# Altium PCB M3FMCWS_B.PcbDoc (part 2 of 2)
Units mil, origin at the board's own origin, x right, y up, seen from the top; angles counter-clockwise.
Board outline 3000 x 2800 mil, 4 copper layers (Top Layer, Layer 1, Layer 2, Bottom Layer), stack 60.556 mil thick; 145 components, 95 nets, 592 pads, 1074 vias.
Unrouted connection lines stored in the file: 9.
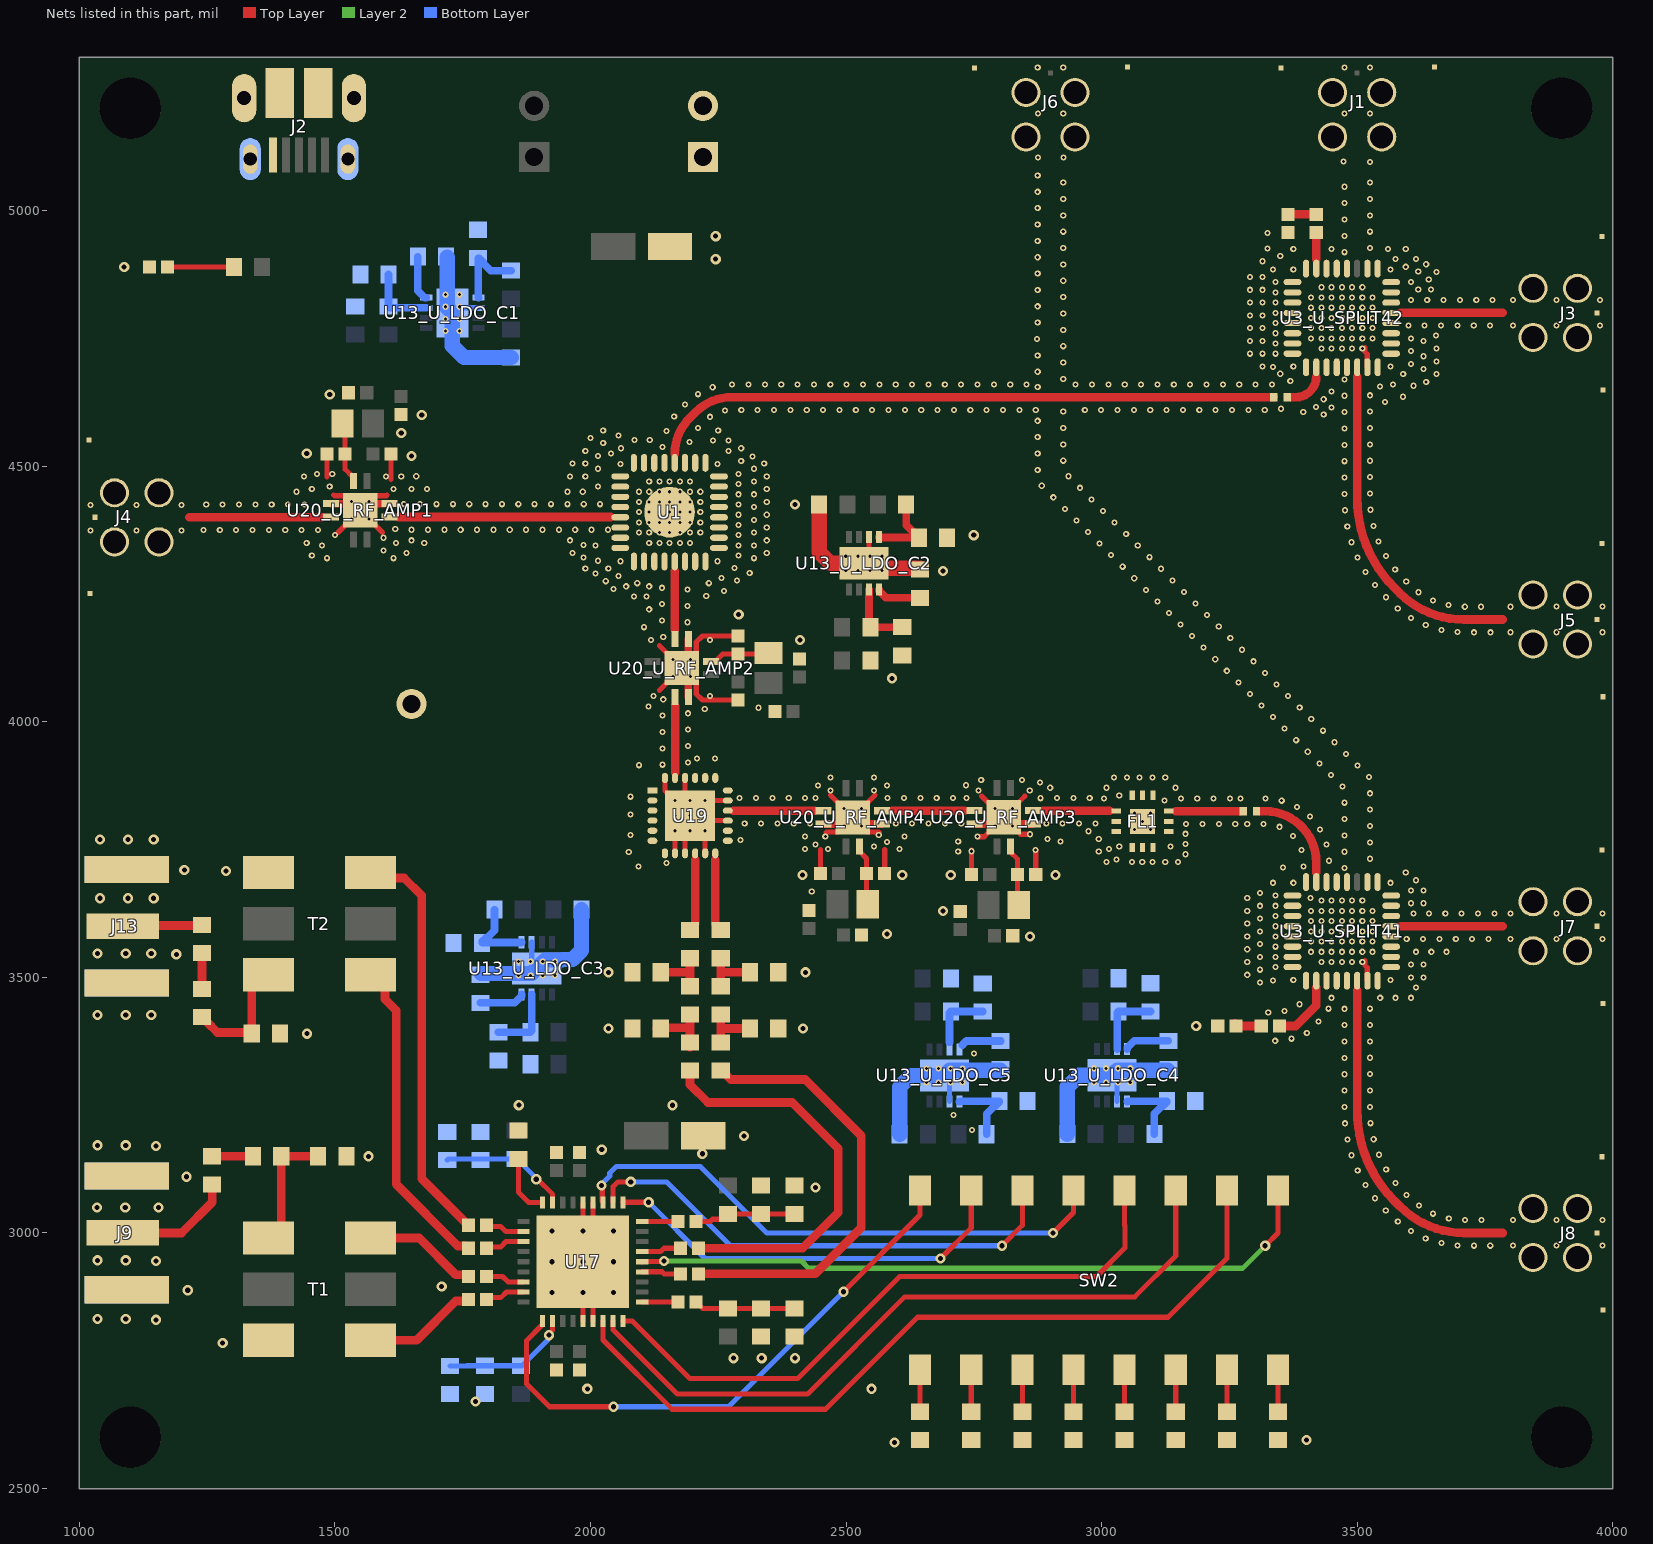
[diagram p4: the nets of this part, all layers, seen from the top]

## Via types
v1: diameter 12, hole 6, Top Layer to Bottom Layer, tented both sides, 958 vias
v2: diameter 20, hole 10, Top Layer to Bottom Layer, tented both sides, 107 vias
v3: diameter 22, hole 10, Top Layer to Bottom Layer, tented both sides, 9 vias

## Nets (pads, with @x,y where several pads share a name; then routed paths per layer and width w, separated by ;. In a path a pad name is that pad's centre, name@x,y a point inside that pad or via, vN(x,y) a via of type N, cw(c..) or ccw(c..) an arc to the next point about the centre after c; other vN are vias at no path point) (continued)
GND: C22.1 C23.1 C28.1 C29.1 C32_U_RF_AMP1.1 C32_U_RF_AMP2.1 C32_U_RF_AMP3.1 C32_U_RF_AMP4.1 C33_U_RF_AMP1.1 C33_U_RF_AMP2.1 C33_U_RF_AMP3.1 C33_U_RF_AMP4.1 C34_U_RF_AMP1.2 C34_U_RF_AMP2.2 C34_U_RF_AMP3.2 C34_U_RF_AMP4.2 C35_U_RF_AMP1.2 C35_U_RF_AMP2.2 C35_U_RF_AMP3.2 C35_U_RF_AMP4.2 C52.2 C53.1 C54.1 C55.1 C56.1 C57.2 C58.1 C70_U_LDO_C1.1 C70_U_LDO_C2.1 C70_U_LDO_C3.1 C70_U_LDO_C4.1 C70_U_LDO_C5.1 C71_U_LDO_C1.1 C71_U_LDO_C2.1 C71_U_LDO_C3.1 C71_U_LDO_C4.1 C71_U_LDO_C5.1 C72_U_LDO_C1.2 C72_U_LDO_C2.2 C72_U_LDO_C3.2 C72_U_LDO_C4.2 C72_U_LDO_C5.2 C141.2 FL1.1 FL1.2 FL1.4 FL1.5 FL1.6 FL1.8 FL1.9 FL1.10 FL1.11 FL1.12 FL1.13 J1.2 J1.3 J1.4 J1.5 J1.6 J1.7 J2.5 J2.6 J2.7 J2.8 J2.9 J2.10 J2.11 J2.S1 J2.S2 J3.2 J3.3 J3.4 J3.5 J3.6 J3.7 J4.2 J4.3 J4.4 J4.5 J4.6 J4.7 J5.2 J5.3 J5.4 J5.5 J5.6 J5.7 J6.2 J6.3 J6.4 J6.5 J6.6 J6.7 J7.2 J7.3 J7.4 J7.5 J7.6 J7.7 J8.2 J8.3 J8.4 J8.5 J8.6 J8.7 J9.2_1 J9.2_2 J9.3_1 J9.3_2 J13.2_1 J13.2_2 J13.3_1 J13.3_2 L2_U_HPF1.1 L2_U_HPF2.1 L4_U_HPF1.1 L4_U_HPF2.1 P3.1 P3.2 R3.1 R16.1 R18.1 R19.1 R26.2 R27.2 R28.2 R29.2 R30.2 R31.2 R33.2 R34.2 R37.1 R38.1 R39.1 R44.1 R95_U_LDO_C1.1 R95_U_LDO_C2.1 R95_U_LDO_C3.1 R95_U_LDO_C4.1 R95_U_LDO_C5.1 R103_U_LDO_C1.1 R103_U_LDO_C2.1 R103_U_LDO_C3.1 R103_U_LDO_C4.1 R103_U_LDO_C5.1 T1.6 T2.4 TP1.1 U1.1 U1.2 U1.3 U1.4 U1.5 U1.6 U1.7 U1.8 U1.9 U1.10 U1.11 U1.13 U1.14 U1.15 U1.16 U1.17 U1.18 U1.19 U1.20 U1.22 U1.23 U1.24 U1.25 U1.26 U1.27 U1.28 U1.30 U1.31 U1.32 U1.33 U3_U_SPLIT41.1 U3_U_SPLIT41.2 U3_U_SPLIT41.3 U3_U_SPLIT41.4 U3_U_SPLIT41.5 U3_U_SPLIT41.6 U3_U_SPLIT41.7 U3_U_SPLIT41.8 U3_U_SPLIT41.9 U3_U_SPLIT41.11 U3_U_SPLIT41.12 U3_U_SPLIT41.13 U3_U_SPLIT41.15 U3_U_SPLIT41.16 U3_U_SPLIT41.17 U3_U_SPLIT41.18 U3_U_SPLIT41.19 U3_U_SPLIT41.20 U3_U_SPLIT41.22 U3_U_SPLIT41.23 U3_U_SPLIT41.24 U3_U_SPLIT41.25 U3_U_SPLIT41.26 U3_U_SPLIT41.28 U3_U_SPLIT41.29 U3_U_SPLIT41.30 U3_U_SPLIT41.32 U3_U_SPLIT41.33 U3_U_SPLIT42.1 U3_U_SPLIT42.2 U3_U_SPLIT42.3 U3_U_SPLIT42.4 U3_U_SPLIT42.5 U3_U_SPLIT42.6 U3_U_SPLIT42.7 U3_U_SPLIT42.8 U3_U_SPLIT42.9 U3_U_SPLIT42.11 U3_U_SPLIT42.12 U3_U_SPLIT42.13 U3_U_SPLIT42.15 U3_U_SPLIT42.16 U3_U_SPLIT42.17 U3_U_SPLIT42.18 U3_U_SPLIT42.19 U3_U_SPLIT42.20 U3_U_SPLIT42.22 U3_U_SPLIT42.23 U3_U_SPLIT42.24 U3_U_SPLIT42.25 U3_U_SPLIT42.26 U3_U_SPLIT42.28 U3_U_SPLIT42.29 U3_U_SPLIT42.30 U3_U_SPLIT42.32 U3_U_SPLIT42.33 U13_U_LDO_C1.6 U13_U_LDO_C1.9 U13_U_LDO_C2.6 U13_U_LDO_C2.9 U13_U_LDO_C3.6 U13_U_LDO_C3.9 U13_U_LDO_C4.6 U13_U_LDO_C4.9 U13_U_LDO_C5.6 U13_U_LDO_C5.9 U17.5 U17.6 U17.22 U17.23 U17.37 U19.1 U19.2 U19.3 U19.4 U19.5 U19.6 U19.7 U19.8 U19.9 U19.11 U19.13 U19.14 U19.15 U19.17 U19.18 U19.19 U19.20 U19.21 U19.22 U19.24 U19.25 U20_U_RF_AMP1.1 U20_U_RF_AMP1.6 U20_U_RF_AMP1.9 U20_U_RF_AMP2.1 U20_U_RF_AMP2.6 U20_U_RF_AMP2.9 U20_U_RF_AMP3.1 U20_U_RF_AMP3.6 U20_U_RF_AMP3.9 U20_U_RF_AMP4.1 U20_U_RF_AMP4.6 U20_U_RF_AMP4.9 | length 4664.6
  Top Layer w10: 1484.83,4478.65 C35_U_RF_AMP1.2@1484.83,4523.65 ; 1497.74,4443.53 1499.12,4442.15 1521.32,4442.15 v1(1532.83,4430.65) v1(1549.83,4413.65) ; 1506.32,4370.14 v1(1532.83,4396.65) v1(1549.83,4413.65) ; 1593.33,4370.14 v1(1566.83,4396.65) v1(1549.83,4413.65) ; 1601.91,4443.53 1600.54,4442.15 1578.33,4442.15 v1(1566.83,4430.65) v1(1549.83,4413.65) ; 1610.26,4474.08 C34_U_RF_AMP1.2@1610.26,4523.65 ; U17.5@1985.24,2827.44 v3(1985.24,2883.68) ; U17.23@1985.24,3059.91 v3(1985.24,3003.68) v3(1985.24,2943.68) ; U17.6@2004.92,2827.44 2004.92,2863.99 v3(1985.24,2883.68) ; U17.22@2004.92,3059.91 2004.92,2963.36 v3(1985.24,2943.68) ; U19.1@2119.66,3865.59 U19.1@2120,3865.25 ; 2135.14,4061.67 v1(2178.65,4105.17) ; 2135.14,4148.68 v1(2178.65,4105.17) ; U19.24@2145.79,3890.09 2145.79,3865.59 2163.85,3847.53 2163.85,3845.91 2174.92,3834.83 2182.31,3834.83 2193.38,3823.76 U19.25@2193.38,3840.42 ; U19.25@2154.01,3826.22 U19.25@2163.85,3816.38 ; U19.25@2163.85,3786.85 U19.25@2193.38,3816.38 ; U19.8@2165.47,3742.66 v1(2165.47,3786.85) ; U19.9@2185.16,3742.66 2185.16,3778.63 2193.38,3786.85 U19.25@2193.38,3816.38 ; U19.22@2185.16,3890.09 2185.16,3854.13 U19.25@2193.38,3845.91 ; U19.25@2222.91,3786.85 U19.25@2203.22,3806.54 ; U19.11@2224.53,3742.66 v1(2224.53,3786.85) ; U19.15@2267.09,3806.54 U19.25@2203.22,3806.54 ; U19.17@2267.09,3845.91 2222.91,3845.91 U19.25@2193.38,3816.38 ; C34_U_RF_AMP2.2@2288.65,4042.46 2219.16,4042.46 2207.15,4054.46 2207.15,4076.67 2191.64,4092.18 v1(2178.65,4105.17) ; C35_U_RF_AMP2.2@2288.65,4167.89 2219.16,4167.89 2207.15,4155.88 2207.15,4133.68 2191.64,4118.17 v1(2178.65,4105.17) ; C34_U_RF_AMP4.2@2450.28,3702.91 2450.28,3750.2 ; 2460.91,3783.03 2462.28,3784.41 2484.49,3784.41 v1(2495.99,3795.91) 2500,3799.92 v1(2512.99,3812.91) ; 2469.49,3856.42 v1(2495.99,3829.91) v1(2512.99,3812.91) ; U13_U_LDO_C2.9@2535,4310 2544.84,4319.84 U13_U_LDO_C2.6@2544.84,4361.18 ; 2556.5,3856.42 v1(2529.99,3829.91) v1(2512.99,3812.91) ; v1@2565.08,3783.03 2563.7,3784.41 2541.5,3784.41 v1(2529.99,3795.91) 2525.98,3799.92 v1(2512.99,3812.91) ; C35_U_RF_AMP4.2@2575.71,3702.91 2575.71,3750.2 ; C34_U_RF_AMP3.2@2745.77,3701.35 v1@2745.77,3748.64 ; v1@2757.68,3775 2770.49,3775 2789.84,3794.35 2791.49,3794.35 2795.5,3798.36 U20_U_RF_AMP3.9@2808.49,3811.35 ; 2764.92,3854.92 2791.49,3828.35 U20_U_RF_AMP3.9@2808.49,3811.35 ; U20_U_RF_AMP3.9@2825.49,3828.35 U20_U_RF_AMP3.9@2808.49,3811.35 ; v1(2825.49,3830) 2849.69,3854.2 ; v1(2860,3780) 2841.49,3780 2827.13,3794.35 2825.49,3794.35 2821.48,3798.36 U20_U_RF_AMP3.9@2808.49,3811.35 ; C35_U_RF_AMP3.2@2871.2,3701.35 v1@2871.2,3748.64 ; v1@3515,3532.39 3515,3523.79 3519.62,3519.17 3519.62,3493.88 U3_U_SPLIT41.15@3520,3493.5 ; v1@3515,4732.39 3515,4723.79 3519.62,4719.17 3519.62,4693.88 U3_U_SPLIT42.15@3520,4693.5 ; v3(1985.24,2883.68) v3(1985.24,2943.68) ; U19.25@2193.38,3816.38 U19.25@2203.22,3806.54
  Top Layer w15: U20_U_RF_AMP1.1@1492.74,4426.64 1528.82,4426.64 v1(1532.83,4430.65) ; v1(1566.83,4430.65) 1570.83,4426.64 U20_U_RF_AMP1.6@1606.91,4426.64 ; U20_U_RF_AMP2.6@2191.64,4048.09 U20_U_RF_AMP2.9@2191.64,4092.18 ; U20_U_RF_AMP2.9@2191.64,4118.17 U20_U_RF_AMP2.1@2191.64,4162.26 ; U20_U_RF_AMP4.6@2455.91,3799.92 U20_U_RF_AMP4.9@2500,3799.92 ; U20_U_RF_AMP4.9@2525.98,3799.92 U20_U_RF_AMP4.1@2570.08,3799.92 ; C72_U_LDO_C2.2@2643.03,4297.56 C72_U_LDO_C2.2@2645,4297.56 ; U20_U_RF_AMP3.6@2751.4,3800.01 2787.48,3800.01 v1(2791.49,3796) ; v1(2825.49,3796) 2829.5,3800.01 U20_U_RF_AMP3.1@2865.57,3800.01
  Top Layer w30: C70_U_LDO_C2.1@2447.44,4425 2447.44,4332.56 2470,4310 U13_U_LDO_C2.9@2535,4310 2545,4300 C72_U_LDO_C2.2@2644.02,4300
  Bottom Layer w10: U13_U_LDO_C1.9@1730,4800 1739.84,4809.84 U13_U_LDO_C1.6@1781.18,4809.84 ; U13_U_LDO_C3.6@1885.17,3568.74 1885.17,3527.4 U13_U_LDO_C3.9@1895.01,3517.56 ; U13_U_LDO_C5.9@2692.56,3308.07 2702.4,3298.23 U13_U_LDO_C5.6@2702.4,3256.89 ; U13_U_LDO_C4.9@3020.57,3308.32 3030.41,3298.48 U13_U_LDO_C4.6@3030.41,3257.14
  Bottom Layer w15: C72_U_LDO_C1.2@1717.56,4908.03 C72_U_LDO_C1.2@1717.56,4910 ; C72_U_LDO_C3.2@1785.01,3505.12 C72_U_LDO_C3.2@1786.98,3505.12 ; C72_U_LDO_C5.2@2800.59,3320.51 C72_U_LDO_C5.2@2802.56,3320.51 ; C72_U_LDO_C4.2@3128.6,3320.76 C72_U_LDO_C4.2@3130.57,3320.76
  Bottom Layer w30: C72_U_LDO_C1.2@1720,4909.02 1720,4810 U13_U_LDO_C1.9@1730,4800 1730,4735 1752.56,4712.44 C70_U_LDO_C1.1@1845,4712.44 ; C72_U_LDO_C3.2@1786,3507.56 1885.01,3507.56 U13_U_LDO_C3.9@1895.01,3517.56 1911.51,3534.06 1944.67,3534.06 1945.62,3535 1965,3535 1982.57,3552.57 C70_U_LDO_C3.1@1982.57,3632.56 ; C70_U_LDO_C5.1@2605,3193.07 2605,3285.51 2627.56,3308.07 U13_U_LDO_C5.9@2692.56,3308.07 2702.56,3318.07 C72_U_LDO_C5.2@2801.57,3318.07 ; C70_U_LDO_C4.1@2933.01,3193.32 2933.01,3285.76 2955.57,3308.32 U13_U_LDO_C4.9@3020.57,3308.32 3030.57,3318.32 C72_U_LDO_C4.2@3129.58,3318.32
  other v1: 3728.32,2975.02 3760.32,2975.02 3805,2975.15 3890,2975.15 3980.14,2975.15 3696.33,2975.57 3664.64,2980.04 3634.02,2989.32 3605.38,3003.59 3579.45,3022.35 3711.07,3024.98 3743.07,3024.98 3805,3025.15 3890,3025 3980.14,3025.15 3679.24,3028.24 3648.65,3037.65 3555.9,3044.02 3620.87,3053.53 3534.53,3067.83 3596.72,3074.53 3516.19,3094.06 3574.79,3097.83 3501.01,3122.22 3556.76,3124.27 3489.17,3151.96 3542.54,3152.94 3480.85,3182.85 3532.32,3183.26 2746.42,3201.44 3476.15,3214.51 3526.35,3214.7 2710.28,3230.94 3475.02,3246.49 3524.98,3246.67 3475.02,3278.49 3524.98,3278.67 2657.13,3294.29 2680.75,3294.29 2704.37,3294.29 2727.99,3294.29 2985.13,3294.54 3008.76,3294.54 3032.38,3294.54 3056,3294.54 3475.02,3310.49 3524.98,3310.67 2657.13,3321.85 2680.75,3321.85 2704.37,3321.85 2727.99,3321.85 2985.13,3322.1 3008.76,3322.1 3032.38,3322.1 3056,3322.1 3475.02,3342.49 3524.98,3342.67 2750.28,3350.94 3475.02,3374.49 3524.98,3374.67 3339.65,3375.89 3371.38,3380.02 3401.41,3391.08 3475.02,3406.49 3524.98,3406.67 3424.04,3413.71 3326.06,3431.12 3357.92,3434.11 3475.02,3438.49 3444.04,3438.68 3524.98,3438.67 3387.04,3447.37 3450,3460 3545,3460 3575,3460 3605,3460 3615,3480 3310,3490 3335.5,3493.82 3375,3495 3565,3495 3605,3500 3630,3500 1859.58,3503.78 1883.2,3503.78 1906.83,3503.78 1930.45,3503.78 3285,3505 3310,3515 3340,3520 3605,3525 3630,3525 3285,3530 3430,3530 3450,3530 3470,3530 3490,3530 3510,3530 1859.58,3531.34 1883.2,3531.34 1906.83,3531.34 1930.45,3531.34 3310,3540 3340,3540 3410,3550 3430,3550 3450,3550 3470,3550 3490,3550 3510,3550 3530,3550 3615,3550 3645,3550 3675,3550 3285,3555 3340,3560 3310,3565 3410,3570 3430,3570 3450,3570 3470,3570 3490,3570 3510,3570 3530,3570 3596.9,3574.97 3628.9,3574.97 3660.9,3574.97 3692.9,3574.97 3724.9,3574.97 3756.9,3574.97 3800,3575.15 3890,3575.15 3980.14,3575.15 3285,3580 3340,3580 3310,3590 3410,3590 3430,3590 3450,3590 3470,3590 3490,3590 3510,3590 3530,3590 3340,3600 3285,3605 3410,3610 3430,3610 3450,3610 3470,3610 3490,3610 3510,3610 3530,3610 3310,3615 3340,3620 3610,3625 3640.36,3625.03 3672.36,3625.03 3704.36,3625.03 3736.36,3625.03 3768.36,3625.03 3800,3625.15 3890,3625.15 3980.14,3625.15 3285,3630 3410,3630 3430,3630 3450,3630 3470,3630 3490,3630 3510,3630 3530,3630 3310,3640 3340,3640 3605,3645 3630,3645 3430,3650 3450,3650 3470,3650 3490,3650 3510,3650 3285,3655 3408.97,3655.46 3340,3660 3310,3665 2432.99,3667.91 3605,3670 3630,3670 3335,3685 3375,3685 3565,3685 3615,3690 3595,3705 3475.02,3713.67 3355,3715 2093.97,3716.69 3395.02,3717.14 2149.16,3723.5 3009.49,3725.86 3059.49,3725.86 3079.49,3725.86 3099.49,3725.86 3124.49,3725.86 3149.49,3725.86 3444.96,3728.09 3029.49,3730.86 3524.98,3732.08 3164.49,3740.86 2075,3745 2719.49,3745.86 2994.49,3745.86 3475.02,3745.67 2745.68,3746.75 2870.7,3749.49 3390.81,3748.86 2419.49,3750.86 2464.49,3750.86 2604.49,3750.86 3014.49,3750.86 2554.49,3755.86 3034.49,3755.86 3134.49,3755.86 2440,3760 3440.03,3759.7 3164.49,3760.86 3524.98,3764.08 2580,3765 2719.49,3765.86 2919.49,3765.86 2293.38,3768.38 2894.49,3770.86 2994.49,3770.86 2419.49,3775.86 2459.49,3775.86 2614.49,3775.86 2757.18,3775.86 3374.46,3776.37 2078.38,3778.38 3475.02,3777.67 2564.03,3778.56 3164.49,3780.86 2974.49,3785.86 2195,3786.85 3064.08,3789 3096.08,3789 3427.16,3789 3348.1,3794.52 3524.98,3796.08 3165.45,3800.1 3197.45,3800.1 3229.45,3800.1 3261.45,3800.1 3285,3800 3316.58,3800.02 2301.8,3801.24 2333.8,3801.24 2365.8,3801.24 2397.8,3801.24 2429.8,3801.24 2597.41,3800.87 2629.41,3800.87 2661.41,3800.87 2693.41,3800.87 2725.41,3800.87 2891.87,3801.01 2923.87,3801.01 2955.87,3801.01 2987.87,3801.01 3080.08,3805 3475.02,3809.67 2808.49,3813 3407.59,3814.32 2165.47,3816.38 2195,3816.38 2224.53,3816.38 2078.38,3818.38 3064.08,3821 3096.08,3821 3524.98,3828.08 2791.49,3830 3381.93,3833.44 3475.02,3841.67 2165.47,3845.91 2195,3845.91 2224.53,3845.91 3123.34,3846.31 3352.33,3845.6 2880.75,3850.45 3005,3850 3155.12,3850.06 3187.12,3850.06 3219.12,3850.06 3251.12,3850.06 3271.58,3849.75 3320.64,3850.02 2291.94,3851.2 2323.94,3851.2 2355.94,3851.2 2387.94,3851.2 2419.94,3851.2 2440.36,3850.89 2581.45,3850.94 2613.45,3850.94 2645.45,3850.94 2677.45,3850.94 2709.45,3850.94 2735.67,3850.62 2912.75,3850.97 2944.75,3850.97 2976.75,3850.97 2078.38,3853.38 3034.49,3855.86 3524.98,3860.08 2469.49,3865.86 2554.49,3865.86 2759.49,3865.86 2859.49,3865.86 2899.49,3870.86 3009.49,3870.86 3144.49,3870.86 3471.23,3873.44 2445,3875 2580,3875 2734.49,3875.86 2879.49,3880.86 2764.49,3885.86 2844.49,3885.86 2469.49,3890.86 2554.49,3890.86 3024.49,3890.86 3049.49,3890.86 3074.49,3890.86 3099.49,3890.86 3124.49,3890.86 3523.37,3892.04 3448.6,3896.07 2095,3915 3500.7,3914.63 2140.72,3915.99 3425.98,3918.7 2190.58,3920.58 2208.38,3928.38 2243.38,3928.38 3478.07,3937.25 3403.35,3941.32 2140.72,3947.99 2190.58,3952.58 3455.45,3959.88 3380.72,3963.95 2140.72,3979.99 3432.82,3982.51 2190.58,3984.58 3358.09,3986.58 3410.19,4005.14 3335.47,4009.21 2140.72,4011.99 2190.58,4016.58 2223.65,4025.17 2328.65,4027.46 3387.56,4027.76 2113.65,4030.17 3312.84,4031.83 2142.45,4043.95 2123.65,4050.17 2233.65,4050.17 3364.94,4050.39 3290.21,4054.46 3342.31,4073.02 3267.58,4077.09 2161.65,4088.17 2195.65,4088.17 3319.68,4095.65 3244.96,4099.72 3297.05,4118.27 2161.65,4122.17 2195.65,4122.17 3222.33,4122.34 3274.43,4140.9 3199.7,4144.97 2118.65,4160.17 2233.65,4160.17 3251.8,4163.53 2142.45,4166.16 3177.07,4167.6 3728.56,4175.02 3760.56,4175.02 3800,4175.15 3890,4175.15 3980.14,4175.15 3696.56,4175.51 3664.85,4179.85 2105,4185 3229.17,4186.16 3634.19,4189 3154.45,4190.23 2189.98,4194.67 2140.02,4198.07 3605.42,4203 3206.54,4208.78 3131.82,4212.85 2115,4220 3579.39,4221.62 3710.52,4224.98 3742.52,4224.98 3800,4225 3890,4225.15 3980.14,4225.15 2189.98,4226.67 3678.68,4228.21 2140.02,4230.07 3183.92,4231.41 3109.19,4235.48 3648.07,4237.54 3556.1,4243.57 2085,4245 2110,4245 2226.62,4246.06 3620.26,4253.37 3161.29,4254.04 2261.62,4256.06 3086.57,4258.11 2189.98,4258.67 2045,4260 2140.02,4262.07 2070,4265 2115,4265 3534.55,4267.22 2091.62,4271.06 2231.62,4271.06 3596.04,4274.28 2030,4275 2286.62,4276.06 3138.66,4276.67 2256.62,4281.06 3063.94,4280.74 2055,4285 2010,4290 2311.62,4291.06 3516.01,4293.3 2499.57,4296.22 2523.19,4296.22 2546.81,4296.22 2570.43,4296.22 3574.35,4297.81 3116.03,4299.29 1990,4300 2035,4300 2281.62,4301.06 3041.31,4303.36 2058.85,4313.96 2248.85,4313.96 2015,4315 1485,4320 1615,4320 2320,4320 1986.62,4321.06 3500.77,4321.44 3093.41,4321.92 2499.57,4323.78 2523.19,4323.78 2546.81,4323.78 2570.43,4323.78 3556.22,4324.17 1455,4325 2290,4325 3018.68,4325.99 1640,4330 1965,4330 2345,4330 1595,4335 1475,4345 2010,4345 2290,4345 2320,4345 3070.78,4344.55 1986.62,4346.06 2996.06,4348.62 1445,4350 1620,4350 1675,4350 2115,4350 2135,4350 2155,4350 2175,4350 2195,4350 3488.93,4351.17 3542.01,4352.85 1650,4355 1960,4355 2345,4355 1595,4360 1500,4365 2290,4365 3048.15,4367.18 2095,4370 2115,4370 2135,4370 2155,4370 2175,4370 2195,4370 2215,4370 2320,4370 2973.43,4371.24 1022,4373.85 1112,4373.85 1200,4373.85 1243.01,4375.02 1275.01,4375.02 1307.01,4375.02 1339.01,4375.02 1371.01,4375.02 1403.01,4375.02 1435.01,4375.02 1467.01,4375.02 1650.25,4375.67 1682.25,4375.67 1714.25,4375.67 1746.25,4375.67 1778.25,4375.67 1810.25,4375.67 1842.25,4375.67 1874.25,4375.67 1906.25,4375.67 1938.25,4375.67 1970.25,4375.67 2002.25,4375.67 2034.25,4375.67 1618.27,4376.74 2345,4380 3480.66,4382.08 3531.87,4383.2 2290,4385 2095,4390 2115,4390 2135,4390 2155,4390 2175,4390 2195,4390 2215,4390 3025.52,4389.8 2950.8,4393.87 2320,4395 2290,4405 2345,4405 2095,4410 2115,4410 2135,4410 2155,4410 2175,4410 2195,4410 2215,4410 3002.9,4412.43 3476.08,4413.75 3526.23,4414.7 2928.17,4416.5 2320,4420 1022,4423.85 1112,4423.85 1200,4423.85 1248.51,4424.98 1280.51,4424.98 1312.51,4424.98 1344.51,4424.98 1376.51,4424.98 1408.51,4424.98 1440.51,4424.98 2290,4425 1634.96,4425.63 1666.96,4425.63 1698.96,4425.63 1730.96,4425.63 1762.96,4425.63 1794.96,4425.63 1826.96,4425.63 1858.96,4425.63 1890.96,4425.63 1922.96,4425.63 1954.96,4425.63 1986.96,4425.63 2018.96,4425.63 2095,4430 2115,4430 2135,4430 2155,4430 2175,4430 2195,4430 2215,4430 2345,4430 2980.27,4435.06 2905.55,4439.13 2290,4445 2320,4445 3475.02,4445.73 3524.98,4446.67 1425,4450 1955,4450 1985,4450 2095,4450 2115,4450 2135,4450 2155,4450 2175,4450 2195,4450 2215,4450 1455,4455 1615,4455 1650,4455 1680,4455 2345,4455 2957.64,4457.68 1490,4460 2015,4460 2882.92,4461.75 2290,4465 2115,4470 2135,4470 2155,4470 2175,4470 2195,4470 2320,4470 3475.02,4477.73 3524.98,4478.67 1440,4480 1600,4480 1630,4480 1659.31,4480.33 1960,4480 1990,4480 2345,4480 2935.01,4480.31 1465,4485 1495,4485 2290,4485 2875.02,4492.76 2015,4495 2320,4495 2058.85,4503.96 2248.85,4503.96 1965,4505 1990,4505 2340,4505 2295,4510 3475.02,4509.73 2924.98,4510.7 3524.98,4510.67 2317.36,4519.09 2015,4520 2040,4525 2875.02,4524.76 1990,4530 2270,4530 2060,4535 2295,4535 2140.96,4537.71 3475.02,4541.73 2924.98,4542.7 3524.98,4542.67 2025,4545 2194.04,4547.1 2240,4550 2270,4550 2086.07,4551.02 2116.07,4551.02 2000,4555 2875.02,4556.76 2055,4560 2148.67,4568.76 2025,4570 2250,4570 3475.02,4573.73 2210.26,4574.69 2924.98,4574.7 3524.98,4574.67 2875.02,4588.76 2163.89,4596.92 2233.62,4596.56 3434.49,4600.86 3394.49,4605.86 3475.02,4605.73 2924.98,4606.7 3524.98,4606.67 2263.19,4608.79 2295.16,4610.07 2327.16,4610.07 2359.16,4610.07 2391.16,4610.07 2423.16,4610.07 2455.16,4610.07 2487.16,4610.07 2519.16,4610.07 2551.16,4610.07 2583.16,4610.07 2615.16,4610.07 2647.16,4610.07 2679.16,4610.07 2711.16,4610.07 2743.16,4610.07 2775.16,4610.07 2807.16,4610.07 2839.16,4610.07 2871.16,4610.07 2967.16,4610.07 2999.16,4610.07 3031.16,4610.07 3063.16,4610.07 3095.16,4610.07 3127.16,4610.07 3159.16,4610.07 3191.16,4610.07 3223.16,4610.07 3255.16,4610.07 3287.16,4610.07 3319.16,4610.07 3351.08,4612.35 3450,4615 3419.49,4615.86 2185.37,4620.63 3554.49,4625.86 3434.49,4630.86 3589.49,4635.86 3475.02,4637.73 3524.98,4638.67 2210.24,4640.77 3449.49,4645.86 2239.2,4654.37 2875,4655 3544.49,4655.86 3610.02,4657.28 2277.28,4659.93 2309.28,4659.93 2341.28,4659.93 2373.28,4659.93 2405.28,4659.93 2437.28,4659.93 2469.28,4659.93 2501.28,4659.93 2533.28,4659.93 2565.28,4659.93 2597.28,4659.93 2629.28,4659.93 2661.28,4659.93 2693.28,4659.93 2725.28,4659.93 2757.28,4659.93 2789.28,4659.93 2821.28,4659.93 2853.28,4659.93 2949.28,4659.93 2981.28,4659.93 3013.28,4659.93 3045.28,4659.93 3077.28,4659.93 3109.28,4659.93 3141.28,4659.93 3173.28,4659.93 3205.28,4659.93 3237.28,4659.93 3269.28,4659.93 3301.28,4659.93 3333.28,4659.93 3570,4660 3635,4665 3369.18,4666.76 3475.02,4669.73 2924.98,4670.7 3590,4680 3655,4680 3349.49,4680.86 2875.02,4684.76 3630,4690 3335.5,4693.82 3315,4695 3375,4695 3565,4695 3605,4700 2924.98,4702.7 3655,4705 3630,4715 2875.02,4716.76 3290,4720 3315,4720 3340,4720 3605,4725 3430,4730 3450,4730 3470,4730 3490,4730 3510,4730 3655,4730 2924.98,4734.7 3340,4740 3290,4745 3315,4745 3630,4745 2873.8,4748.74 3410,4750 3430,4750 3450,4750 3470,4750 3490,4750 3510,4750 3530,4750 3605,4750 3654.49,4755.86 3340,4760 1716.22,4764.57 1743.78,4764.57 2924.98,4766.7 3290,4770 3315,4770 3410,4770 3430,4770 3450,4770 3470,4770 3490,4770 3510,4770 3530,4770 3600.04,4775.07 3632.04,4775.07 3664.04,4775.07 3696.04,4775.07 3728.04,4775.07 3760.04,4775.07 3805,4775 3890,4775 3975,4775 3340,4780 2875.02,4780.72 1716.22,4788.19 1743.78,4788.19 3410,4790 3430,4790 3450,4790 3470,4790 3490,4790 3510,4790 3530,4790 3290,4795 3315,4795 2924.98,4798.7 3340,4800 3410,4810 3430,4810 3450,4810 3470,4810 3490,4810 3510,4810 3530,4810 1716.22,4811.81 1743.78,4811.81 2875.02,4812.72 3290,4820 3315,4820 3340,4820 3604.99,4824.93 3636.99,4824.93 3668.99,4824.93 3700.99,4824.93 3732.99,4824.93 3764.99,4824.93 3805,4825 3890,4825 3975,4825 3410,4830 3430,4830 3450,4830 3470,4830 3490,4830 3510,4830 3530,4830 2924.98,4830.7 1716.22,4835.43 1743.78,4835.43 3340,4840 2875.02,4844.72 3290,4845 3315,4845 3619.49,4845.86 3644.49,4845.86 3430,4850 3450,4850 3470,4850 3490,4850 3510,4850 3340,4860 3605,4860 2924.98,4862.7 3640,4865 3290,4870 3315,4870 2875.02,4876.72 3655,4880 3619.49,4880.86 3335,4885 3375,4885 3565,4885 3595,4890 2924.98,4894.7 3635,4895 3314.49,4900.86 3575,4905 3615,4905 2875.02,4908.72 3349.49,4910.86 3475.02,4918.58 3375,4925 3450,4925 3560,4925 3595,4925 3324.49,4925.86 2924.98,4926.7 3524.98,4926.7 2875.02,4940.72 3475.02,4950.58 3324.49,4955.86 2924.98,4958.7 3524.98,4958.7 2875.02,4972.72 3475.02,4982.58 2924.98,4990.7 3524.98,4990.7 2875.02,5004.72 3475.02,5014.58 2924.98,5022.7 3524.98,5022.7 2875.02,5036.72 3475.02,5046.58 2924.98,5054.7 3524.98,5054.7 2875.02,5068.72 3525,5095 3473,5096 2875.84,5104 2925.84,5104 2875.84,5190 2925,5190 3475,5190 3525,5190 2875,5280 2925,5280 3475,5280 3525,5280
  other v2: 2595,2590 3400.62,2594.86 1775,2670 1993.98,2695 2550,2695 2280,2755 2335,2755 2400,2755 1280.62,2784.86 1150,2830 1035.96,2831.44 1090.96,2831.44 1212.26,2887.95 1708.98,2895 1150,2945 1035.96,2946.44 1090.96,2946.44 1035,3050 1090,3050 1155,3050 2440.24,3088.68 1210,3110 1565.62,3149.86 2218.98,3155 2022.26,3162.95 1150,3170 1035.96,3171.44 1090.96,3171.44 2300.62,3189.86 1860,3250 2160.62,3249.86 1445.62,3389.86 2035.62,3399.86 2415.62,3399.86 3185,3405 1035.96,3426.44 1090.96,3426.44 1140.96,3426.44 2035.62,3509.86 2420.62,3509.86 1190,3545 1035.96,3546.44 1090.96,3546.44 1140.96,3546.44 2860,3580 2580,3585 2690,3630 1040.62,3654.86 1095.62,3654.86 1145.62,3654.86 2415,3700 2610,3700 2705,3700 2910,3700 1287.26,3707.95 1205.62,3709.86 1040.62,3769.86 1095.62,3769.86 1145.62,3769.86 2590,4085 2410,4160 2290,4210 2690,4295 2750,4365 2400,4425 1650,4520 1445,4525 1630,4565 1670,4600 1490,4640 1087.95,4889.76 2245,4905 2245,4950
  other v3: 1925.24,2883.68 2045.24,2883.68 1925.24,2943.68 2045.24,2943.68 1925.24,3003.68 2045.24,3003.68
LO_RX: J8.1 U3_U_SPLIT41.14 | length 662.2
  Top Layer w17: 3500,3475 3500,3239.64 ccw(c3751.38,3239.5) 3583.28,3052.59 3583.33,3052.54 cw(c3571.91,3039.95) 3583.94,3051.97 ccw(c3708.81,3176.03) 3709.02,3000 3785,3000
LO_TX: J5.1 U3_U_SPLIT42.14 | length 662.7
  Top Layer w17: 3500,4675 3500,4437.46 ccw(c3746.75,4437.21) 3572.53,4262.47 3583.14,4251.86 ccw(c3708.13,4376.56) 3708.36,4200 3785,4200
NetC22_2: C22.2 R14.1 R16.2 R32.1 | length 198.4
  Top Layer w10: R32.1@2206.69,3022.56 2234.49,3022.56 2238.62,3026.69 2258.23,3026.69 R14.1@2268.98,3037.44 R16.2@2333.98,3037.44 C22.2@2398.98,3037.44
NetC23_2: C23.2 R15.1 R19.2 R25.1 | length 197.4
  Top Layer w10: R25.1@2206.69,2865 2219.13,2852.56 R19.2@2333.98,2852.56 C23.2@2398.98,2852.56
NetC24_1: C24.1 L5.2 | length 80
  Top Layer w17: C24.1@1260,3150.12 1260.06,3150.06 1339.94,3150.06 L5.2@1340,3150
NetC24_2: C24.2 J9.1 | length 234.9
  Top Layer w17: J9.1@1085,3000 1200,3000 1260,3060 C24.2@1260,3095
NetC25_1: C25.1 R3.2 | length 55
  Top Layer w17: R3.2@3365,4992.72 C25.1@3420,4992.72
NetC25_2: C25.2 U3_U_SPLIT42.31 | length 52.3
  Top Layer w17: 3420,4905 C25.2@3420,4957.28
NetC26_1: C26.1 L6.2 | length 77
  Top Layer w17: C26.1@1240,3547.44 L6.2@1240,3477.56 L6.2@1245,3482.56
NetC26_2: C26.2 J13.1 | length 156.1
  Top Layer w17: J13.1@1085,3600 1086.28,3601.28 1238.72,3601.28 C26.2@1240,3602.56
NetC28_2: C28.2 R35.1 R37.2 U17.26 | length 252.8
  Top Layer w10: v2(1893.98,3105) 1896.68,3105 1926.18,3075.5 U17.26@1926.18,3059.91
  Bottom Layer w10: C28.2@1720,3142.44 1722.56,3145 1783.98,3145 R35.1@1853.98,3145 1855.95,3145 1893.98,3106.97 v2(1893.98,3105)
NetC29_2: C29.2 R36.1 R38.2 U17.2 | length 243.7
  Top Layer w10: v2(1918.98,2800) 1918.98,2802.71 1926.18,2809.91 U17.2@1926.18,2827.44
  Bottom Layer w10: C29.2@1725,2740 1758.48,2740 1758.6,2740.12 R38.2@1793.98,2740.12 R36.1@1863.98,2740.12 1865.94,2740.12 v2@1917.06,2791.24
NetC30_U_HPF1_1: C30_U_HPF1.1 C49.1 | length 796.5
  Top Layer w17: C30_U_HPF1.1@2195,3317.44 2195,3290 2230,3255 2395,3255 2485,3165 2485,3040 2415,2970 C49.1@2211.69,2970
NetC30_U_HPF1_2: C30_U_HPF1.2 C31_U_HPF1.1 L2_U_HPF1.2 | length 124.8
  Top Layer w17: L2_U_HPF1.2@2130.31,3400 2131.6,3401.29 2188.71,3401.29 ; C31_U_HPF1.1@2185.78,3420.19 2193.03,3427.44 C31_U_HPF1.1@2195,3427.44 ; C30_U_HPF1.2@2195,3363.78 C30_U_HPF1.2@2195,3372.56 2195,3380 2195,3395 C31_U_HPF1.1@2195,3417.44
NetC30_U_HPF2_1: C30_U_HPF2.1 C48.1 | length 863.4
  Top Layer w17: C48.1@2211.69,2920 2440,2920 2530,3010 2530,3190 2420,3300 2274.41,3300 2256.97,3317.44 C30_U_HPF2.1@2255,3317.44
NetC30_U_HPF2_2: C30_U_HPF2.2 C31_U_HPF2.1 L2_U_HPF2.2 | length 114.5
  Top Layer w17: C30_U_HPF2.2@2255,3372.56 2255,3398.18 ; C31_U_HPF2.1@2258.91,3420.14 2258.91,3420.19 2255,3423.79 2255,3398.18 ; L2_U_HPF2.2@2312.44,3400 2259.4,3400 ccw(c2259.4,3393.77) 2255,3398.18
NetC31_U_HPF1_2: C31_U_HPF1.2 C62_U_HPF1.1 L4_U_HPF1.2 | length 100.8
  Top Layer w17: L4_U_HPF1.2@2135,3505 L4_U_HPF1.2@2135,3506.97 ; L4_U_HPF1.2@2137.56,3501.97 L4_U_HPF1.2@2144.81,3509.22 ; 2154.77,3510 2195,3510 ; C31_U_HPF1.2@2195,3484.06 2195,3510 ; C62_U_HPF1.1@2195,3532.44 2195,3510
NetC31_U_HPF2_2: C31_U_HPF2.2 C62_U_HPF2.1 L4_U_HPF2.2 | length 111.8
  Top Layer w17: C31_U_HPF2.2@2255,3486.28 C31_U_HPF2.2@2258.4,3482.88 ; C31_U_HPF2.2@2255,3488.72 2255,3513.08 ; C62_U_HPF2.1@2255,3537.44 2255,3513.08 ; L4_U_HPF2.2@2312.44,3510 2262.44,3510 cw(c2262.44,3520.52) 2255,3513.08
NetC35_U_RF_AMP1_1: C35_U_RF_AMP1.1 L3_U_RF_AMP1.1 U20_U_RF_AMP1.8 | length 113.9
  Top Layer w10: L3_U_RF_AMP1.1@1520.26,4578.69 C35_U_RF_AMP1.1@1520.26,4523.65 1520.26,4493.88 1534.55,4479.59 U20_U_RF_AMP1.8@1534.55,4470.73
NetC35_U_RF_AMP2_1: C35_U_RF_AMP2.1 L3_U_RF_AMP2.1 U20_U_RF_AMP2.8 | length 113.9
  Top Layer w10: U20_U_RF_AMP2.8@2235.73,4118.17 2244.59,4118.17 2258.88,4132.46 C35_U_RF_AMP2.1@2288.65,4132.46 2343.37,4132.46 L3_U_RF_AMP2.1@2343.65,4132.73
NetC35_U_RF_AMP3_1: C35_U_RF_AMP3.1 L3_U_RF_AMP3.1 U20_U_RF_AMP3.8 | length 113.9
  Top Layer w10: U20_U_RF_AMP3.8@2821.48,3754.27 2821.48,3745.41 2835.77,3731.12 C35_U_RF_AMP3.1@2835.77,3701.35 2835.77,3646.63 L3_U_RF_AMP3.1@2836.05,3646.35
NetC35_U_RF_AMP4_1: C35_U_RF_AMP4.1 L3_U_RF_AMP4.1 U20_U_RF_AMP4.8 | length 113.9
  Top Layer w10: U20_U_RF_AMP4.8@2525.98,3755.83 2525.98,3746.97 2540.28,3732.68 C35_U_RF_AMP4.1@2540.28,3702.91 2540.28,3648.19 L3_U_RF_AMP4.1@2540.55,3647.91
NetC48_2: C48.2 U17.13 | length 76.4
  Top Layer w10: U17.13@2101.47,2923.99 2139.98,2923.99 2143.98,2920 C48.2@2176.26,2920
NetC49_2: C49.2 U17.15 | length 77.5
  Top Layer w10: U17.15@2101.47,2963.36 2137.34,2963.36 2143.98,2970 C49.2@2176.26,2970
NetC57_1: C57.1 L5.1 T1.4 | length 243.4
  Top Layer w17: T1.4@1370,2990 1371.14,2990 1395.12,3013.98 L5.1@1395.12,3150 C57.1@1467.44,3150
NetC58_2: C58.2 L6.1 T2.6 | length 243.6
  Top Layer w17: L6.1@1240,3422.44 1241.97,3422.44 1249.22,3415.19 1249.22,3413.22 1270.47,3391.97 1335.47,3391.97 C58.2@1337.44,3390 ; C58.2@1337.44,3391.97 1337.44,3481.02 1361.42,3505 T2.6@1370,3505
NetC62_U_HPF1_2: C62_U_HPF1.2 U19.10 | length 126.5
  Top Layer w17: C62_U_HPF1.2@2195,3592.56 C62_U_HPF1.2@2196.97,3592.56 ; C62_U_HPF1.2@2204.84,3605.43 2204.84,3730
NetC62_U_HPF2_2: C62_U_HPF2.2 U19.12 | length 134.1
  Top Layer w17: C62_U_HPF2.2@2244.21,3605 2244.21,3730 ; C62_U_HPF2.2@2249.21,3598.35 ccw(c2255,3598.35) C62_U_HPF2.2@2255,3592.56
NetC63_1: C63.1 R44.2 | length 55.6
  Top Layer w17: R44.2@3260.43,3410 R44.2@3264.73,3405.7 ; R44.2@3262.72,3405 C63.1@3312.28,3405
NetC63_2: C63.2 U3_U_SPLIT41.10 | length 116.6
  Top Layer w17: C63.2@3355,3405 3380,3405 3420,3445 U3_U_SPLIT41.10@3420,3480
NetC65_1: C65.1 U3_U_SPLIT42.10 | length 72.8
  Top Layer w17: C65.1@3370,4635 3380,4635 ccw(c3380,4675) 3420,4675
NetC65_2: C65.2 U1.12 | length 1233.8
  Top Layer w16.9: U1.12@2165,4523.58 cw(c2265,4523.58) 2194.29,4594.29 2205.71,4605.71 cw(c2276.42,4535) 2276.42,4635 C65.2@3337.01,4635
NetC67_1: C67.1 U3_U_SPLIT41.31 | length 187.1
  Top Layer w17: C67.1@3310,3825 3320,3825 cw(c3320,3725) 3420,3725 3420,3705
NetC67_2: C67.2 FL1.3 | length 125.1
  Top Layer w17: 3145,3825.08 C67.2@3270,3825.08 ; 3264.92,3825.08 3265,3825
NetC72_U_LDO_C1_1: C72_U_LDO_C1.1 U13_U_LDO_C1.4 | length 88.8
  Bottom Layer w15: C72_U_LDO_C1.1@1662.44,4910 1662.44,4843.19 1676.1,4829.53 U13_U_LDO_C1.4@1678.82,4829.53
NetC72_U_LDO_C2_1: C72_U_LDO_C2.1 U13_U_LDO_C2.4 | length 88.8
  Top Layer w15: U13_U_LDO_C2.4@2564.53,4258.82 2564.53,4256.1 2578.19,4242.44 C72_U_LDO_C2.1@2645,4242.44
NetC72_U_LDO_C3_1: C72_U_LDO_C3.1 U13_U_LDO_C3.4 | length 88.8
  Bottom Layer w15: C72_U_LDO_C3.1@1785.01,3450 1851.83,3450 1865.49,3463.66 U13_U_LDO_C3.4@1865.49,3466.38
NetC72_U_LDO_C4_1: C72_U_LDO_C4.1 U13_U_LDO_C4.4 | length 88.8
  Bottom Layer w15: U13_U_LDO_C4.4@3050.1,3359.5 3050.1,3362.22 3063.76,3375.88 C72_U_LDO_C4.1@3130.57,3375.88
NetC72_U_LDO_C5_1: C72_U_LDO_C5.1 U13_U_LDO_C5.4 | length 77.9
  Bottom Layer w15: U13_U_LDO_C5.4@2727.87,3367.76 2735.75,3375.63 C72_U_LDO_C5.1@2802.56,3375.63
NetD2_2: D2.2 R18.2 | length 129.7
  Top Layer w10: R18.2@1172.72,4890 D2.2@1302.44,4890
NetFL1_7: FL1.7 U20_U_RF_AMP3.2 | length 131
  Top Layer w17: 2885,3825.99 3015.99,3825.99
NetJ4_1: J4.1 U20_U_RF_AMP1.2 | length 260
  Top Layer w17: 1215,4400 1475,4400
NetR21_1: R21.1 U17.35 | length 78.4
  Top Layer w10: R21.1@1796.69,2870 1800.08,2873.39 1824.49,2873.39 1835.72,2884.62 U17.35@1869,2884.62
NetR21_2: R21.2 T1.1 | length 224.4
  Top Layer w17: T1.1@1570,2790 1660,2790 1736.8,2866.8 1758.06,2866.8 R21.2@1761.26,2870
NetR22_1: R22.1 U17.34 | length 76.7
  Top Layer w10: R22.1@1796.69,2915 1828,2915 1838.69,2904.31 U17.34@1869,2904.31
NetR22_2: R22.2 T1.3 | length 222.3
  Top Layer w17: T1.3@1570,2990 1665,2990 1736.8,2918.2 1758.06,2918.2 R22.2@1761.26,2915
NetR23_1: R23.1 U17.29 | length 77.4
  Top Layer w10: R23.1@1796.69,3015 1798.91,3012.79 1824.49,3012.79 1834.54,3002.73 U17.29@1869,3002.73
NetR23_2: R23.2 T2.3 | length 801.4
  Top Layer w17: T2.3@1570,3705 1580.54,3694.46 1635.54,3694.46 1670,3660 1670,3106.26 R23.2@1761.26,3015
NetR24_1: R24.1 U17.30 | length 77.7
  Top Layer w10: R24.1@1796.69,2970 1799.3,2972.6 1824.49,2972.6 1834.93,2983.05 U17.30@1869,2983.05
NetR24_2: R24.2 T2.1 | length 626.1
  Top Layer w17: T2.1@1570,3505 1574.04,3505 1598.02,3481.02 1598.02,3456.98 1620,3435 1620,3095 1740.7,2974.3 1756.96,2974.3 R24.2@1761.26,2970
NetR25_2: R25.2 U17.10 | length 69.8
  Top Layer w10: U17.10@2101.5,2864.97 R25.2@2171.23,2864.97
NetR26_1: R26.1 SW2.16 | length 82.2
  Top Layer w10: R26.1@3345,2650.12 SW2.16@3345,2732.36
NetR27_1: R27.1 SW2.15 | length 82.2
  Top Layer w10: R27.1@3245,2650.12 SW2.15@3245,2732.36
NetR28_1: R28.1 SW2.14 | length 82.2
  Top Layer w10: R28.1@3145,2650.12 SW2.14@3145,2732.36
NetR29_1: R29.1 SW2.13 | length 82.2
  Top Layer w10: R29.1@3045,2650.12 SW2.13@3045,2732.36
NetR30_1: R30.1 SW2.12 | length 82.2
  Top Layer w10: R30.1@2945,2650.12 SW2.12@2945,2732.36
NetR31_1: R31.1 SW2.11 | length 82.2
  Top Layer w10: R31.1@2845,2650.12 SW2.11@2845,2732.36
NetR32_2: R32.2 U17.18 | length 69.8
  Top Layer w10: U17.18@2101.47,3022.42 2101.54,3022.49 2171.19,3022.49 R32.2@2171.26,3022.56
NetR33_1: R33.1 SW2.10 | length 82.2
  Top Layer w10: R33.1@2745,2650.12 SW2.10@2745,2732.36
NetR34_1: R34.1 SW2.9 | length 82.2
  Top Layer w10: R34.1@2645,2650.12 SW2.9@2645,2732.36
NetR39_2: R39.2 U17.27 | length 120.8
  Top Layer w10: R39.2@1858.98,3145 1858.98,3080 1879.06,3059.91 U17.27@1906.5,3059.91
NetR94_U_LDO_C1_1: R94_U_LDO_C1.1 R95_U_LDO_C1.2 U13_U_LDO_C1.3 | length 137.4
  Bottom Layer w15: R95_U_LDO_C1.2@1605,4875 R94_U_LDO_C1.1@1605,4812.56 1607.72,4809.84 U13_U_LDO_C1.3@1678.82,4809.84
NetR94_U_LDO_C2_1: R94_U_LDO_C2.1 R95_U_LDO_C2.2 U13_U_LDO_C2.3 | length 137.4
  Top Layer w15: U13_U_LDO_C2.3@2544.84,4258.82 2544.84,4187.72 R94_U_LDO_C2.1@2547.56,4185 R95_U_LDO_C2.2@2610,4185
NetR94_U_LDO_C3_1: R94_U_LDO_C3.1 R95_U_LDO_C3.2 U13_U_LDO_C3.3 | length 137.4
  Bottom Layer w15: R95_U_LDO_C3.2@1820.01,3392.56 R94_U_LDO_C3.1@1882.46,3392.56 1885.17,3395.28 U13_U_LDO_C3.3@1885.17,3466.38
NetR94_U_LDO_C4_1: R94_U_LDO_C4.1 R95_U_LDO_C4.2 U13_U_LDO_C4.3 | length 137.4
  Bottom Layer w15: U13_U_LDO_C4.3@3030.41,3359.5 3030.41,3430.61 R94_U_LDO_C4.1@3033.13,3433.32 R95_U_LDO_C4.2@3095.57,3433.32
NetR94_U_LDO_C5_1: R94_U_LDO_C5.1 R95_U_LDO_C5.2 U13_U_LDO_C5.3 | length 123.6
  Bottom Layer w15: 2702.4,3373.07 2702.4,3430.35 R94_U_LDO_C5.1@2705.12,3433.07 R95_U_LDO_C5.2@2767.56,3433.07
NetR98_U_LDO_C1_2: R98_U_LDO_C1.2 R103_U_LDO_C1.2 U13_U_LDO_C1.5 | length 153.2
  Bottom Layer w15: U13_U_LDO_C1.5@1781.18,4829.53 1780.59,4830.12 1780.59,4906.85 1782.56,4906.85 1790.22,4899.19 1790.22,4897.22 1804.88,4882.56 R98_U_LDO_C1.2@1845,4882.56
NetR98_U_LDO_C2_2: R98_U_LDO_C2.2 R103_U_LDO_C2.2 U13_U_LDO_C2.5 | length 153.2
  Top Layer w15: U13_U_LDO_C2.5@2564.53,4361.18 2565.12,4360.59 2641.85,4360.59 2641.85,4362.56 2634.19,4370.22 2632.22,4370.22 2617.56,4384.88 R98_U_LDO_C2.2@2617.56,4425
NetR98_U_LDO_C3_2: R98_U_LDO_C3.2 R103_U_LDO_C3.2 U13_U_LDO_C3.5 | length 153.2
  Bottom Layer w15: R98_U_LDO_C3.2@1812.46,3632.56 1812.46,3592.44 1797.79,3577.78 1795.82,3577.78 1788.16,3570.12 1788.16,3568.15 1864.9,3568.15 U13_U_LDO_C3.5@1865.49,3568.74
NetR98_U_LDO_C4_2: R98_U_LDO_C4.2 R103_U_LDO_C4.2 U13_U_LDO_C4.5 | length 153.2
  Bottom Layer w15: U13_U_LDO_C4.5@3050.1,3257.14 3050.69,3257.73 3127.42,3257.73 3127.42,3255.76 3119.76,3248.11 3117.79,3248.11 3103.13,3233.44 R98_U_LDO_C4.2@3103.13,3193.32
NetR98_U_LDO_C5_2: R98_U_LDO_C5.2 R103_U_LDO_C5.2 U13_U_LDO_C5.5 | length 153.2
  Bottom Layer w15: U13_U_LDO_C5.5@2722.09,3256.89 2722.68,3257.48 2799.41,3257.48 2799.41,3255.51 2791.75,3247.85 2789.78,3247.85 2775.12,3233.19 R98_U_LDO_C5.2@2775.12,3193.07
NetSW2_1: SW2.1 U17.14 | length 1361.2
  Top Layer w10: U17.14@2101.47,2943.68 2102.13,2944.34 2143.32,2944.34 v2(2143.98,2945) ; v2(3320,2975) 3345,3000 SW2.1@3345,3082.76
  Layer 2 w10: v2(2143.98,2945) 2412.78,2945 2426.78,2931 3276,2931 v2(3320,2975)
NetSW2_2: SW2.2 U17.7 | length 1568.5
  Top Layer w10: U17.7@2024.61,2827.44 2024.61,2790.39 2160,2655 2460,2655 2640,2835 3130,2835 3245,2950 SW2.2@3245,3082.76
NetSW2_3: SW2.3 U17.8 | length 1409.1
  Top Layer w10: U17.8@2044.29,2827.44 2044.29,2810.71 2170,2685 2425,2685 2615,2875 3065,2875 3145,2955 SW2.3@3145,3082.76
NetSW2_4: SW2.4 U17.9 | length 1246.7
  Top Layer w10: U17.9@2063.98,2827.44 2082.56,2827.44 2195,2715 2405,2715 2605,2915 2990,2915 3045.86,2970.86 3045.86,3014.11 3045,3014.97 SW2.4@3045,3082.76
NetSW2_5: SW2.5 U17.21 | length 1090.8
  Top Layer w10: v2(2021.79,3092.76) 2023.2,3091.36 2023.2,3061.32 U17.21@2024.61,3059.91 ; v2(2905,3000) 2945,3040 SW2.5@2945,3082.76
  Bottom Layer w10: v2(2021.79,3092.76) 2021.79,3095.47 2037.85,3111.52 2037.85,3117.15 2050.69,3130 2215,3130 2345.12,2999.88 2904.88,2999.88 v2(2905,3000)
NetSW2_6: SW2.6 U17.20 | length 971.2
  Top Layer w10: U17.20@2044.29,3059.91 2044.29,3090.32 2053.98,3100 v2(2078.98,3100) ; v2(2805,2975) 2845,3015 SW2.6@2845,3082.76
  Bottom Layer w10: v2(2078.98,3100) 2148.98,3100 2273.98,2975 v2(2805,2975)
NetSW2_7: SW2.7 U17.19 | length 824.2
  Top Layer w10: U17.19@2063.98,3059.91 2064.02,3059.96 2113.93,3059.96 v2(2113.98,3060) ; v2(2685,2950) 2745,3010 SW2.7@2745,3082.76
  Bottom Layer w10: v2(2113.98,3060) 2223.98,2950 v2(2685,2950)
NetU1_21: U1.21 U20_U_RF_AMP1.5 | length 415
  Top Layer w17: 1625,4400.65 2040,4400.65
NetU1_29: U1.29 U20_U_RF_AMP2.2 | length 115
  Top Layer w17: 2165,4180 2165,4295
NetU19_16: U19.16 U20_U_RF_AMP4.5 | length 158.8
  Top Layer w17: 2280,3826.22 2438.78,3826.22
NetU19_23: U19.23 U20_U_RF_AMP2.5 | length 130
  Top Layer w16.9: 2165.65,3900 2165.65,4030
NetU20_U_RF_AMP4_2: U20_U_RF_AMP3.5 U20_U_RF_AMP4.2 | length 140
  Top Layer w17.1: 2591,3825.95 2731,3825.95
RX: J7.1 U3_U_SPLIT41.21 | length 200
  Top Layer w17.1: 3585,3600 3785,3600
SD: SW2.8 U17.1 | length 1120.5
  Top Layer w10: U17.1@1906.5,2820.71 1875,2789.21 1875,2705 1920,2660 v2(2045,2660) ; v2(2495,2885) 2645,3035 SW2.8@2645,3082.76
  Bottom Layer w10: v2(2045,2660) 2270,2660 v2(2495,2885)
TX: J3.1 U3_U_SPLIT42.21 | length 200
  Top Layer w16.9: 3585,4800 3785,4800
pads on no net: J2.2 J2.3 J2.4 T1.2 T1.5 T2.2 T2.5 U17.11 U17.12 U17.16 U17.17 U17.28 U17.31 U17.32 U17.33 U17.36 U20_U_RF_AMP1.3 U20_U_RF_AMP1.4 U20_U_RF_AMP2.3 U20_U_RF_AMP2.4 U20_U_RF_AMP3.3 U20_U_RF_AMP3.4 U20_U_RF_AMP4.3 U20_U_RF_AMP4.4

## Polygon pours and split planes (outlines as drawn)
GND on Top Layer "GND_L01_P016" (solid, pour order 16): 1000,2500 4000,2500 4000,5300 1000,5300
GND on Layer 1 "GND_L02_P017" (solid, pour order 17): 1000,2500 4000,2500 4000,5300 1000,5300
5V5 on Layer 2 "5V5_L03_P018" (solid, pour order 18): 1000,2500 4000,2500 4000,5300 1000,5300
GND on Bottom Layer "GND_L04_P019" (solid, pour order 19): 1000,2500 4000,2500 4000,5300 1000,5300

## Silkscreen, mask and mechanical layers (free items; w line width, h text height)
Top Overlay:
  text "VCC" at 2050,5075 h60 r90
  text "GND" at 2380,5075 h60 r90
  text "TX-C" at 3320,5055 h60 r90
  text "RX-C" at 2720,5050 h60 r90
  text "TX" at 3870,4995 h60
  text "EXT" at 1065,4595 h60
  text "TX-LO" at 3690,4395 h60
  text "GND" at 1715,4005 h60
  text "RX" at 3870,3795 h60
  text "IF1" at 1040,3780 h60
  text "RX-LO" at 3690,3195 h60
  text "IF2" at 1030,3190 h60
  text "UCSD M3FMCWS Ver.B" at 1375,2575 h60

## Text inside footprints (layer, text, board x,y; h text height)
J2: Mechanical 13 "PCB EDGE" at 1252.83,5279.06 h32 r180
U13_U_LDO_C1: Bottom Overlay "*" at 1610,4740 h50 r180
U13_U_LDO_C2: Top Overlay "*" at 2472.01,4225.35 h50 r90
U13_U_LDO_C3: Bottom Overlay "*" at 1958.01,3432.91 h50 r270
U13_U_LDO_C4: Bottom Overlay "*" at 2957.58,3392.97 h50 r90
U13_U_LDO_C5: Bottom Overlay "*" at 2629.57,3392.72 h50 r90
U17: Top Overlay "*" at 1905,2770 h50 r90; Mechanical 13 "*" at 1921.65,2828.82 h50 r90
U19: Top Overlay "*" at 2067.88,3865.43 h50; Mechanical 13 "*" at 2125.73,3823.15 h50